# Altium PCB Unitree_HW_LIB_DEMO.PcbDoc
Units mil, origin at the board's own origin, x right, y up, seen from the top; angles counter-clockwise.
Board outline 2870.03 x 590.03 mil, 2 copper layers (Top Layer, Bottom Layer), stack 62.205 mil thick; 6 components, 0 nets, 30 pads, 0 vias.
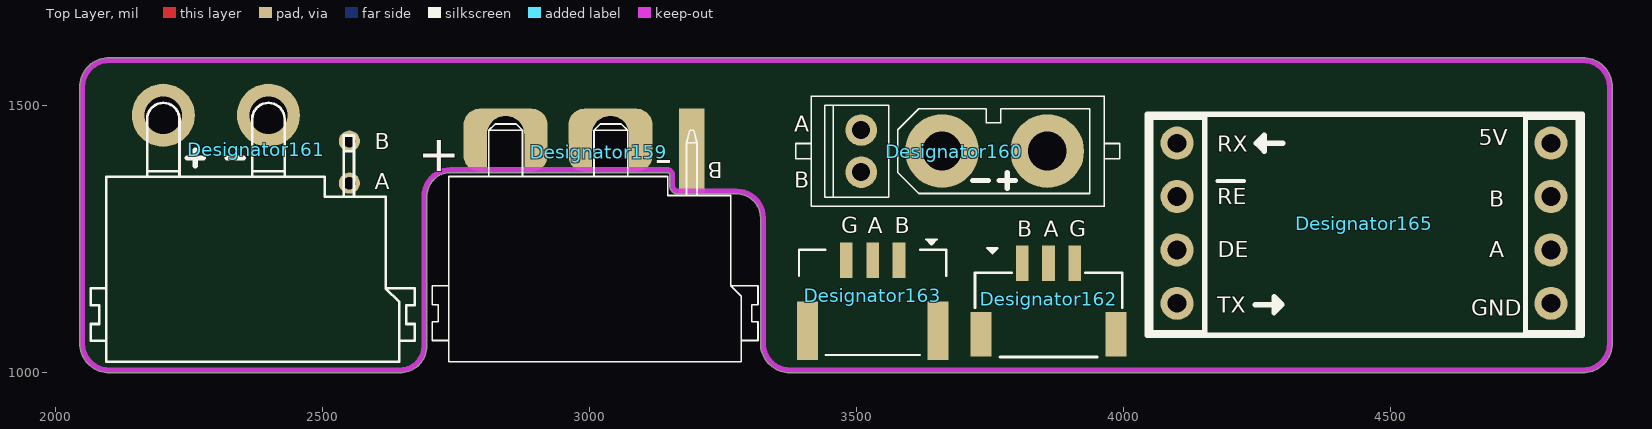
[diagram p0: Top Layer view]
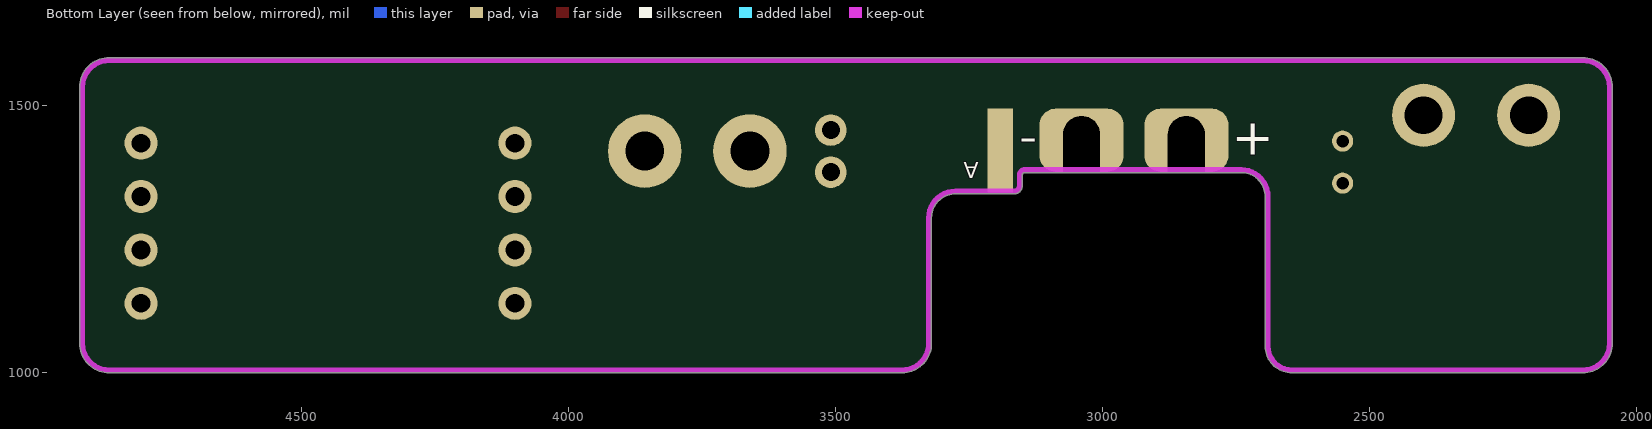
[diagram p1: Bottom Layer view, seen from below]

## Layer stack, top to bottom
Top Solder: solder mask 0.3937, Solder Resist, Dk 3.5
Top Layer: signal copper 1.1811
Dielectric 1: dielectric 59.8425, FR-4, Dk 4.8
Bottom Layer: signal copper 1.1811
Bottom Solder: solder mask 0.3937, Solder Resist, Dk 3.5

## Board outline
2044.98,1055 ccw(c2100,1055) 2100,999.99 2645,999.99 ccw(c2645,1050) 2695.01,1050 2695.01,1330 cw(c2740,1330) 2740,1374.98 3145,1374.98 cw(c3145,1370) 3149.99,1370 3149.99,1350 ccw(c3165,1350) 3165,1334.98 3275,1334.98 cw(c3275,1290) 3319.99,1290 3319.99,1055 ccw(c3375,1055) 3375,999.99 4860,999.99 ccw(c4860,1055) 4915.02,1055 4915.02,1535 ccw(c4860,1535) 4860,1590.02 2100,1590.02 ccw(c2100,1535) 2044.98,1535

## Design rules (kind name [scope] priority, off if disabled: settings)
Clearance [All] p1: gap=10 ignorepadtopadclearanceinfootprint=FALSE except(0: Arc-Hole Track-Hole SMDPad-Hole THPad-Hole Via-Hole Fill-Hole Poly-Hole Region-Hole Text-Hole)
PolygonConnect [All] p1: connectstyle=Relief reliefconductorwidth=10 reliefentries=4 polygonreliefangle="90 Angle" airgapwidth=10
RoutingVias [All] p1: holewidth=28 width=50 viastyle="Through Hole" minholewidth=28 minwidth=50 maxholewidth=28 maxwidth=50
SolderMaskExpansion [All] p1: expansion=4 istentingtop=FALSE
Width [All] p1: maxlimit=10 minlimit=10 preferedwidth=10
30 further rules are at their usual default settings.

## Components (designator, comment, footprint, x,y, rotation, side; value= is the part's Value field where it differs from the comment)
Designator159 "Comment" "XT30PB(2+2)-M 卧式半孔" 3010,1365 r180 top
Designator160 "Comment" "XT30PB(2+2)-M 立式" 3856.85,1415.01 r0 top
Designator161 "Comment" "XT30PW(2+2)-M 卧式" 2201.57,1482.17 r0 top
Designator162 "Comment" "GH_1.25_3P 卧贴" 3859.21,1138.5 r0 top
Designator163 "Comment" "GH_1.25_3P 立贴" 3530,1125 r0 top
Designator165 "Comment" YS_TTL_TO_485_MODULE 4100,1430 r0 top

## Footprints (in the part's own frame and the unit in brackets; to place one, negate y for a bottom-side part, rotate by r counter-clockwise, add the part's x,y. Pads: shape width x height; smd on the part's side, far side on the other; paste and mask are expansions set on the pad)
"GH_1.25_3P 卧贴" [mm]
  rect 0.6x1.7 smd: 1(-1.25,1.689) 2(0,1.689) 3(1.25,1.689)
  rect 1x2.1 smd: ""(-3.216,-1.689) ""(3.216,-1.689)
  silkscreen extent -3.5,-2.77 3.5,2.41, body extent -3.5,-2.79 3.5,2.06, height 4.35
"GH_1.25_3P 立贴" [mm]
  rect 1x2.8 smd: 0(-3.1,-1.175) 0(3.1,-1.175)
  rect 0.6x1.7 smd: 1(1.25,2.175) 2(0,2.175) 3(-1.25,2.175)
  silkscreen extent -3.5,-2.33 3.5,3.17, body extent -3.5,-2.27 3.5,2.68, height 4.18
"XT30PB(2+2)-M 卧式半孔" [mm]
  rect 1.2x4 smd far side: 1(-4.6,-1.3)
  rect 1.2x4 smd: 2(-4.6,-1.3)
  rrect50% 4x3 hole 1.75 slot 3.5 at 90 deg copper offset 0,-0.6: 3(-0.734,-1.188) 4(4.25,-1.188)
  silkscreen extent -7.75,-2.56 7.75,8.74, body extent -7.75,-2.56 7.75,8.74, height 1.83
"XT30PB(2+2)-M 立式" [mm]
  round 1.5 hole 0.85: 1(-8.85,1) 2(-8.85,-1)
  round 3.5 hole 1.85: 3(-5,0) 4(0,0)
  silkscreen extent -11.96,-2.62 3.45,2.62, body extent -12,-2.62 3.5,2.58, height 8.9
"XT30PW(2+2)-M 卧式" [mm]
  round 1 hole 0.6: 1(8.85,-3.23) 2(8.85,-1.23)
  round 3 hole 1.8: 3(5,0) 4(0,0)
  silkscreen extent -3.45,-11.73 11.96,0.59, body extent -3.46,-11.7 11.95,0.62, height 5.22
YS_TTL_TO_485_MODULE [mil]
  round 62 hole 35: 1(0,0) 2(0,-100) 3(0,-200) 4(0,-300) 5(700,-300) 6(700,-200) 7(700,-100) 8(700,0)
  silkscreen extent -56,-360 759,54, body extent -55,-359 760,55, height 232

## Nets (pads, with @x,y where several pads share a name; then routed paths per layer and width w, separated by ;. In a path a pad name is that pad's centre, name@x,y a point inside that pad or via, vN(x,y) a via of type N, cw(c..) or ccw(c..) an arc to the next point about the centre after c; other vN are vias at no path point)
pads on no net: Designator159.1 Designator159.2 Designator159.3 Designator159.4 Designator160.1 Designator160.2 Designator160.3 Designator160.4 Designator161.1 Designator161.2 Designator161.3 Designator161.4 Designator162. Designator162.1 Designator162.2 Designator162.3 Designator163.0 Designator163.1 Designator163.2 Designator163.3 Designator165.1 Designator165.2 Designator165.3 Designator165.4 Designator165.5 Designator165.6 Designator165.7 Designator165.8

## Keep-outs
Keep-Out Layer:
  lines w10: 2050,1510 2050,1535 cw(c2100,1535) 2100,1585 4860,1585 cw(c4860,1535) 4910,1535 4910,1055 cw(c4860,1055) 4860,1005 3375,1005 cw(c3375,1055) 3325,1055 3325,1290 ccw(c3275,1290) 3275,1340 3165,1340 cw(c3165,1350) 3155,1350 3155,1370 ccw(c3145,1370) 3145,1380 2740,1380 ccw(c2740,1330) 2690,1330 2690,1050 cw(c2645,1050) 2645,1005 2100,1005 cw(c2100,1055) 2050,1055 2050,1520

## Text inside footprints (layer, text, board x,y; h text height)
Designator159: Top Overlay "-" at 3155.32,1441.85 h118.11 r180; Top Overlay "+" at 2757.25,1457.48 h118.11 r180; Top Overlay "B" at 3249,1394 h30 r180; Bottom Overlay "-" at 3155.99,1388.46 h118.11; Bottom Overlay "+" at 2757.25,1385.64 h118.11; Bottom Overlay "A" at 3231,1394 h30 r180
Designator160: Top Overlay "B" at 3382.85,1346.01 h30; Top Overlay "A" at 3382.85,1451.01 h30
Designator161: Top Overlay "A" at 2597.57,1343.17 h30; Top Overlay "B" at 2597.57,1418.17 h30
Designator162: Top Overlay "G" at 3898.27,1254.21 h30; Top Overlay "A" at 3850.21,1254.5 h30; Top Overlay "B" at 3800.21,1254.5 h30
Designator163: Top Overlay "G" at 3471,1261 h30; Top Overlay "A" at 3521,1261 h30; Top Overlay "B" at 3571,1261 h30
Designator165: Top Overlay "A" at 4684.7,1215.88 h30; Top Overlay "B" at 4685,1311 h30; Top Overlay "5V" at 4664.98,1425.71 h30; Top Overlay "GND" at 4651.01,1106.28 h30; Top Overlay "TX" at 4174.9,1112.23 h30; Top Overlay "DE" at 4176,1216 h30; Top Overlay "RE" at 4174.9,1315.36 h30; Top Overlay "RX" at 4174.9,1414.28 h30